# Altium PCB pay-ssm.PcbDoc (part 1 of 2)
Units mm, origin at the board's own origin, x right, y up, seen from the top; angles counter-clockwise.
Board outline 128 x 54 mm, 4 copper layers (Top Layer, GND, VCC, Bottom Layer), stack 0.778 mm thick; 182 components, 174 nets, 793 pads, 185 vias.
Unrouted connection lines stored in the file: 368.
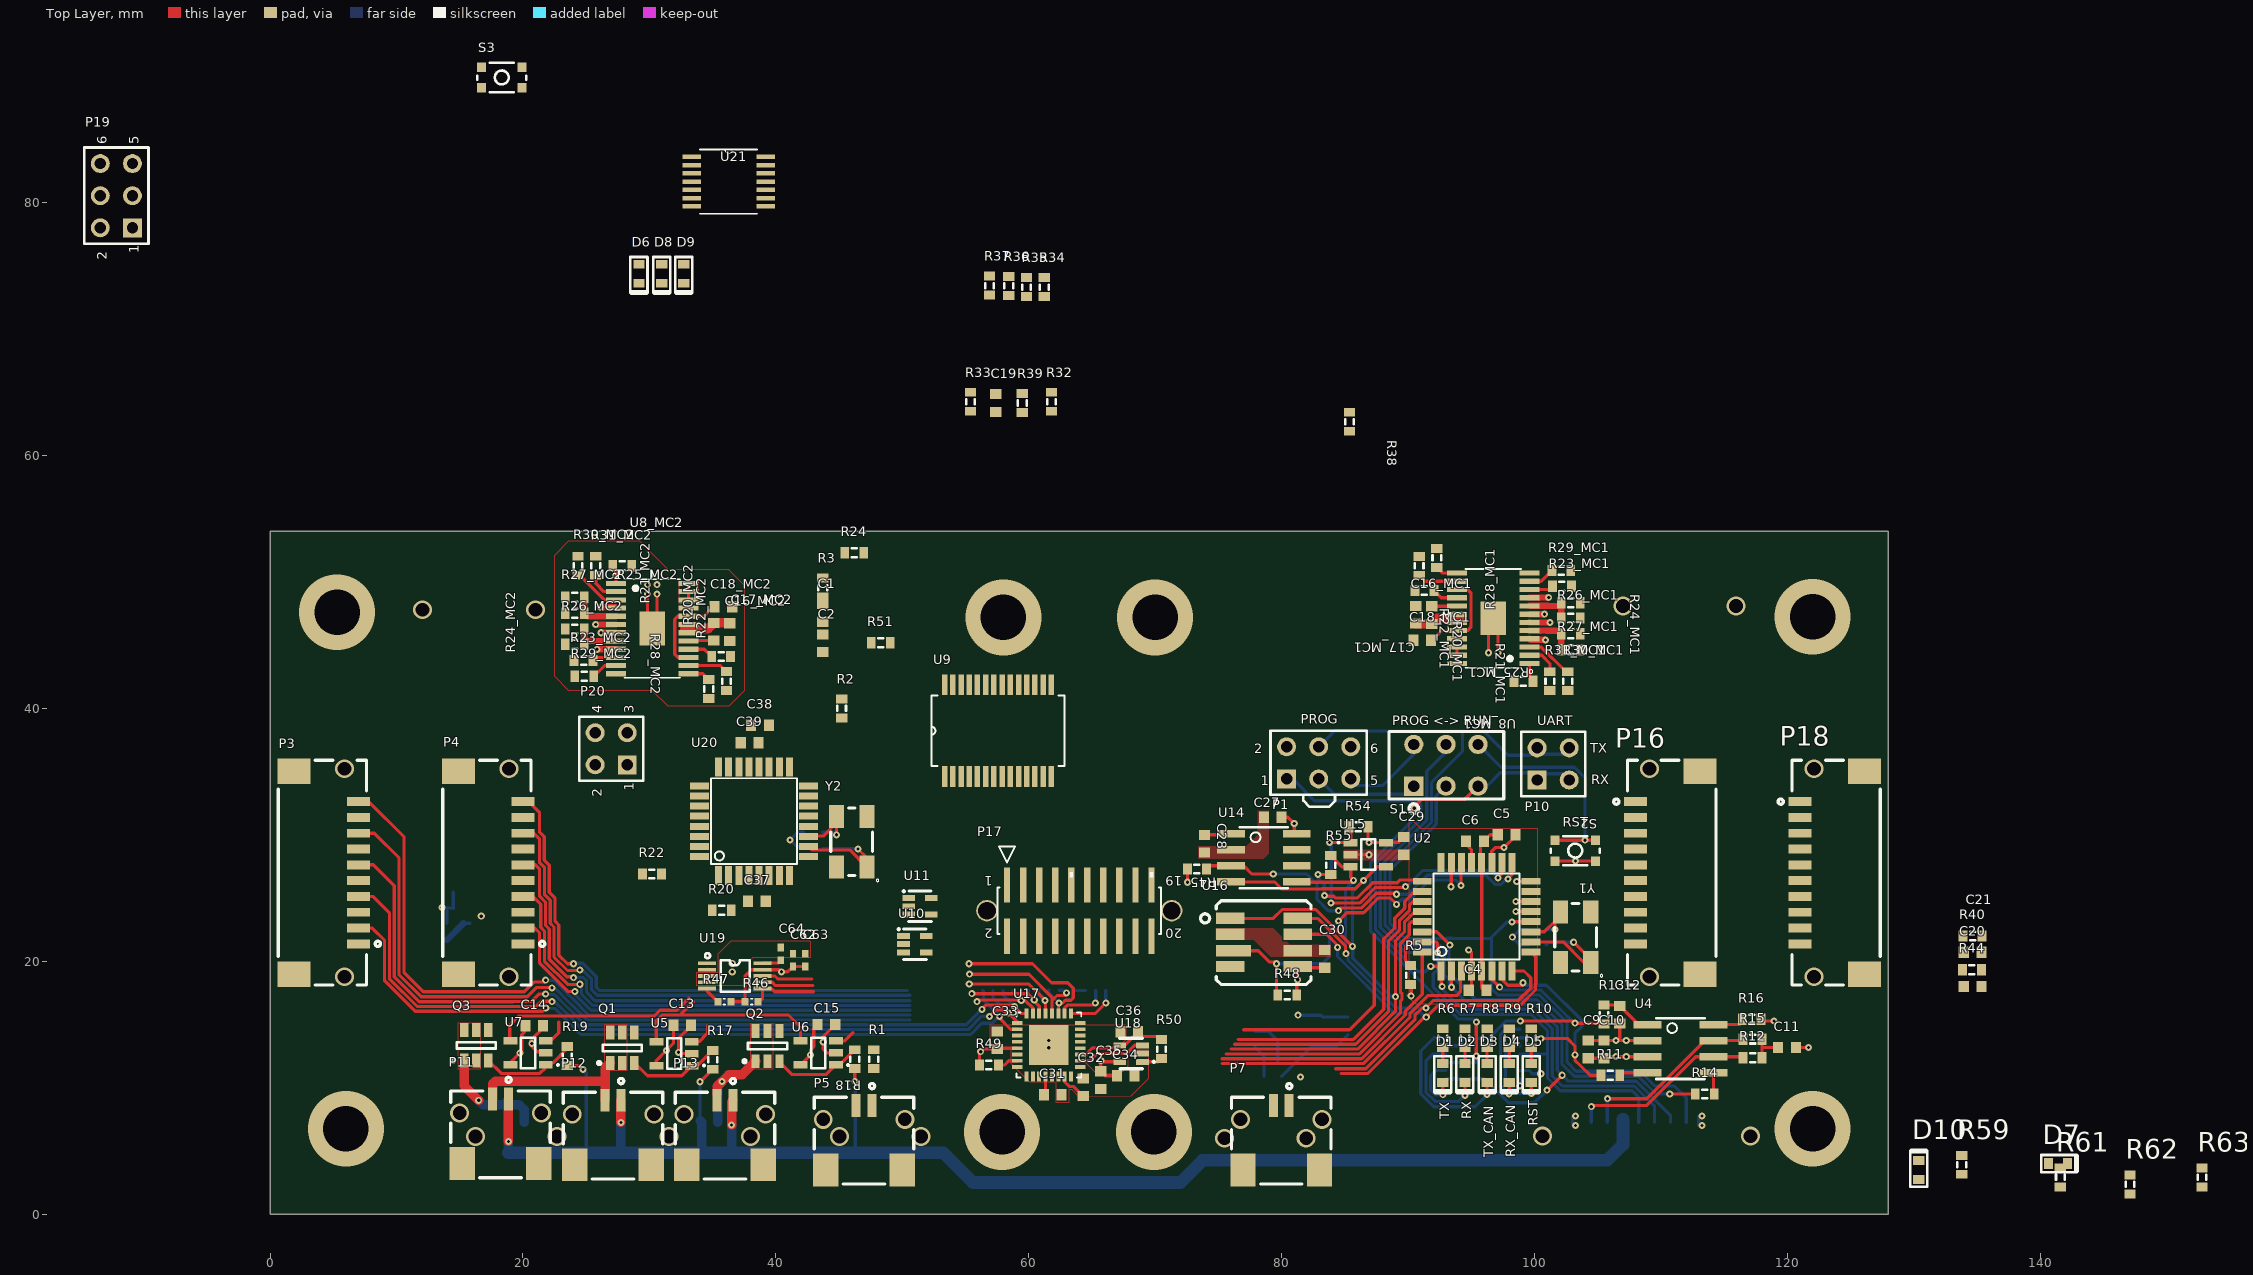
[diagram p0: Top Layer view]
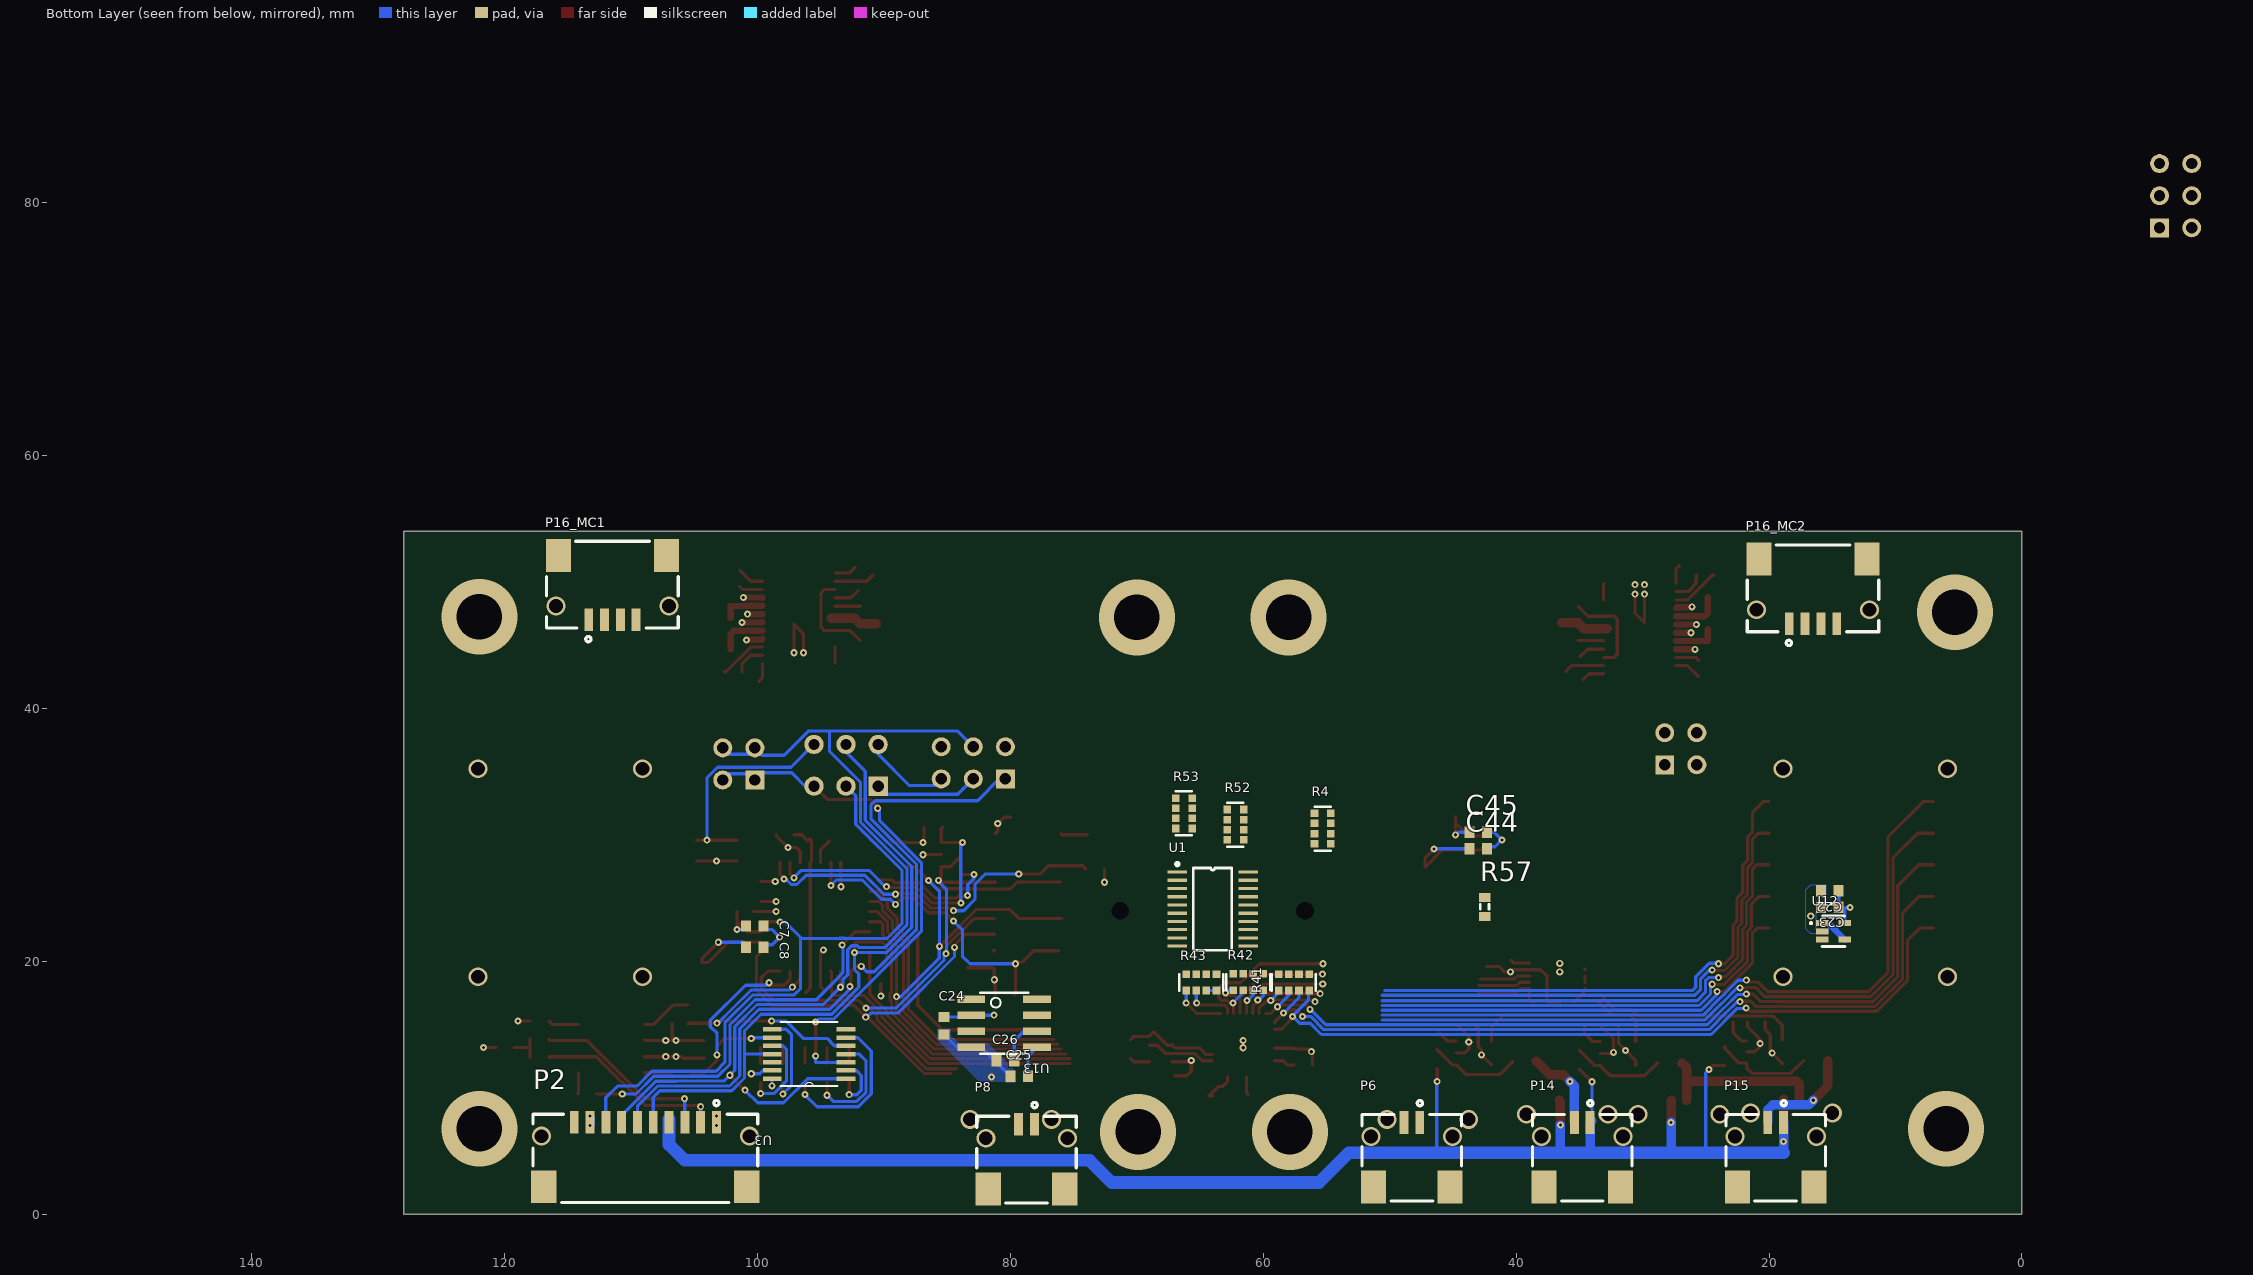
[diagram p1: Bottom Layer view, seen from below]
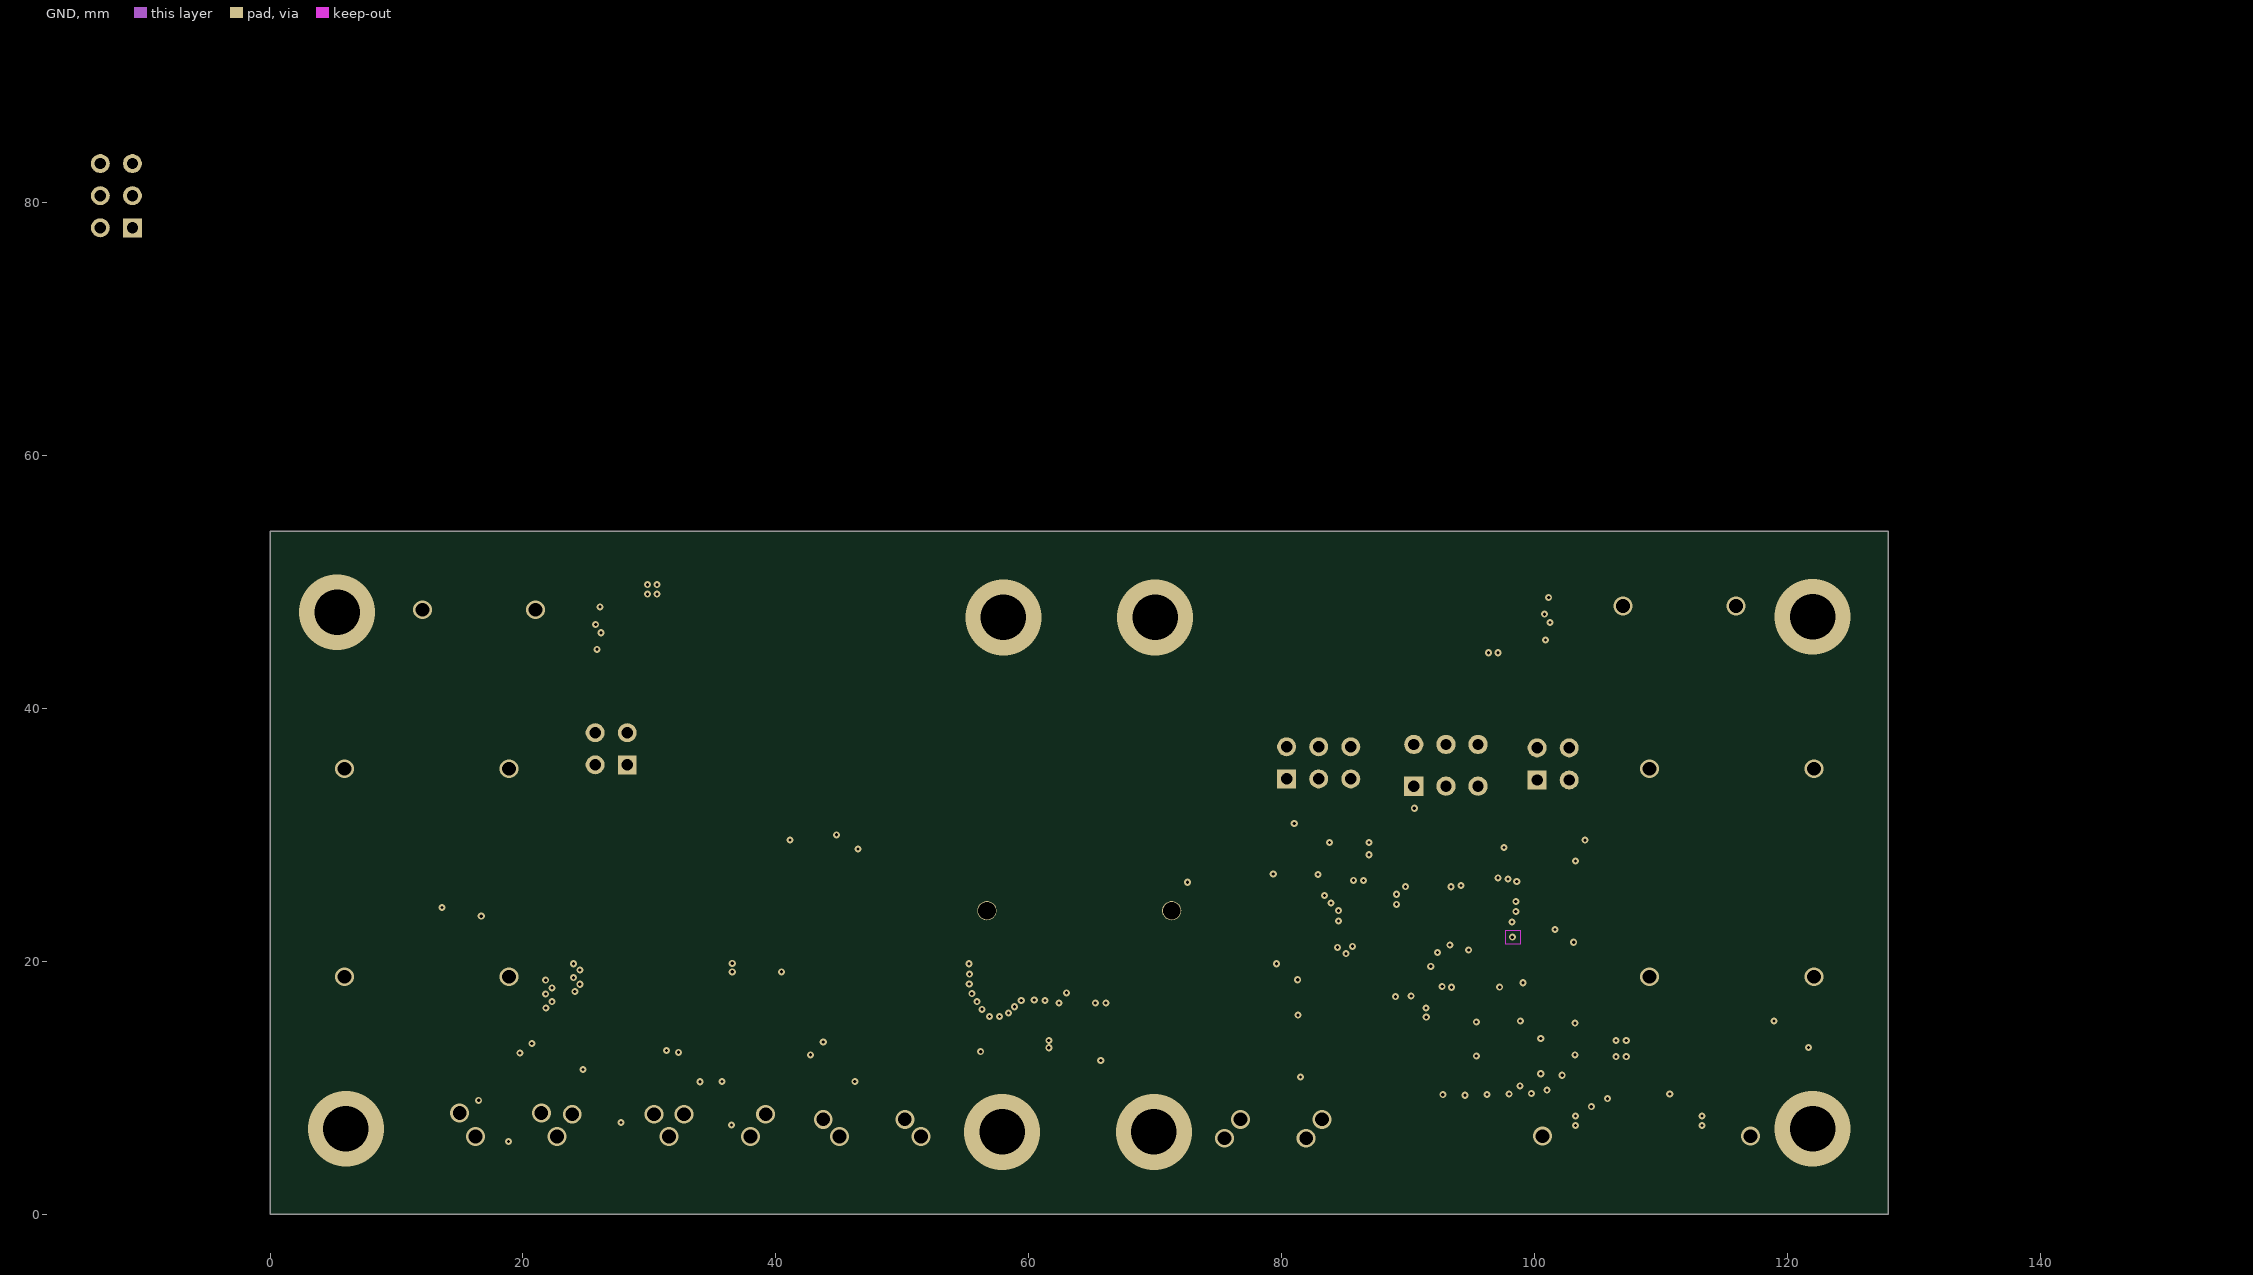
[diagram p2: GND]
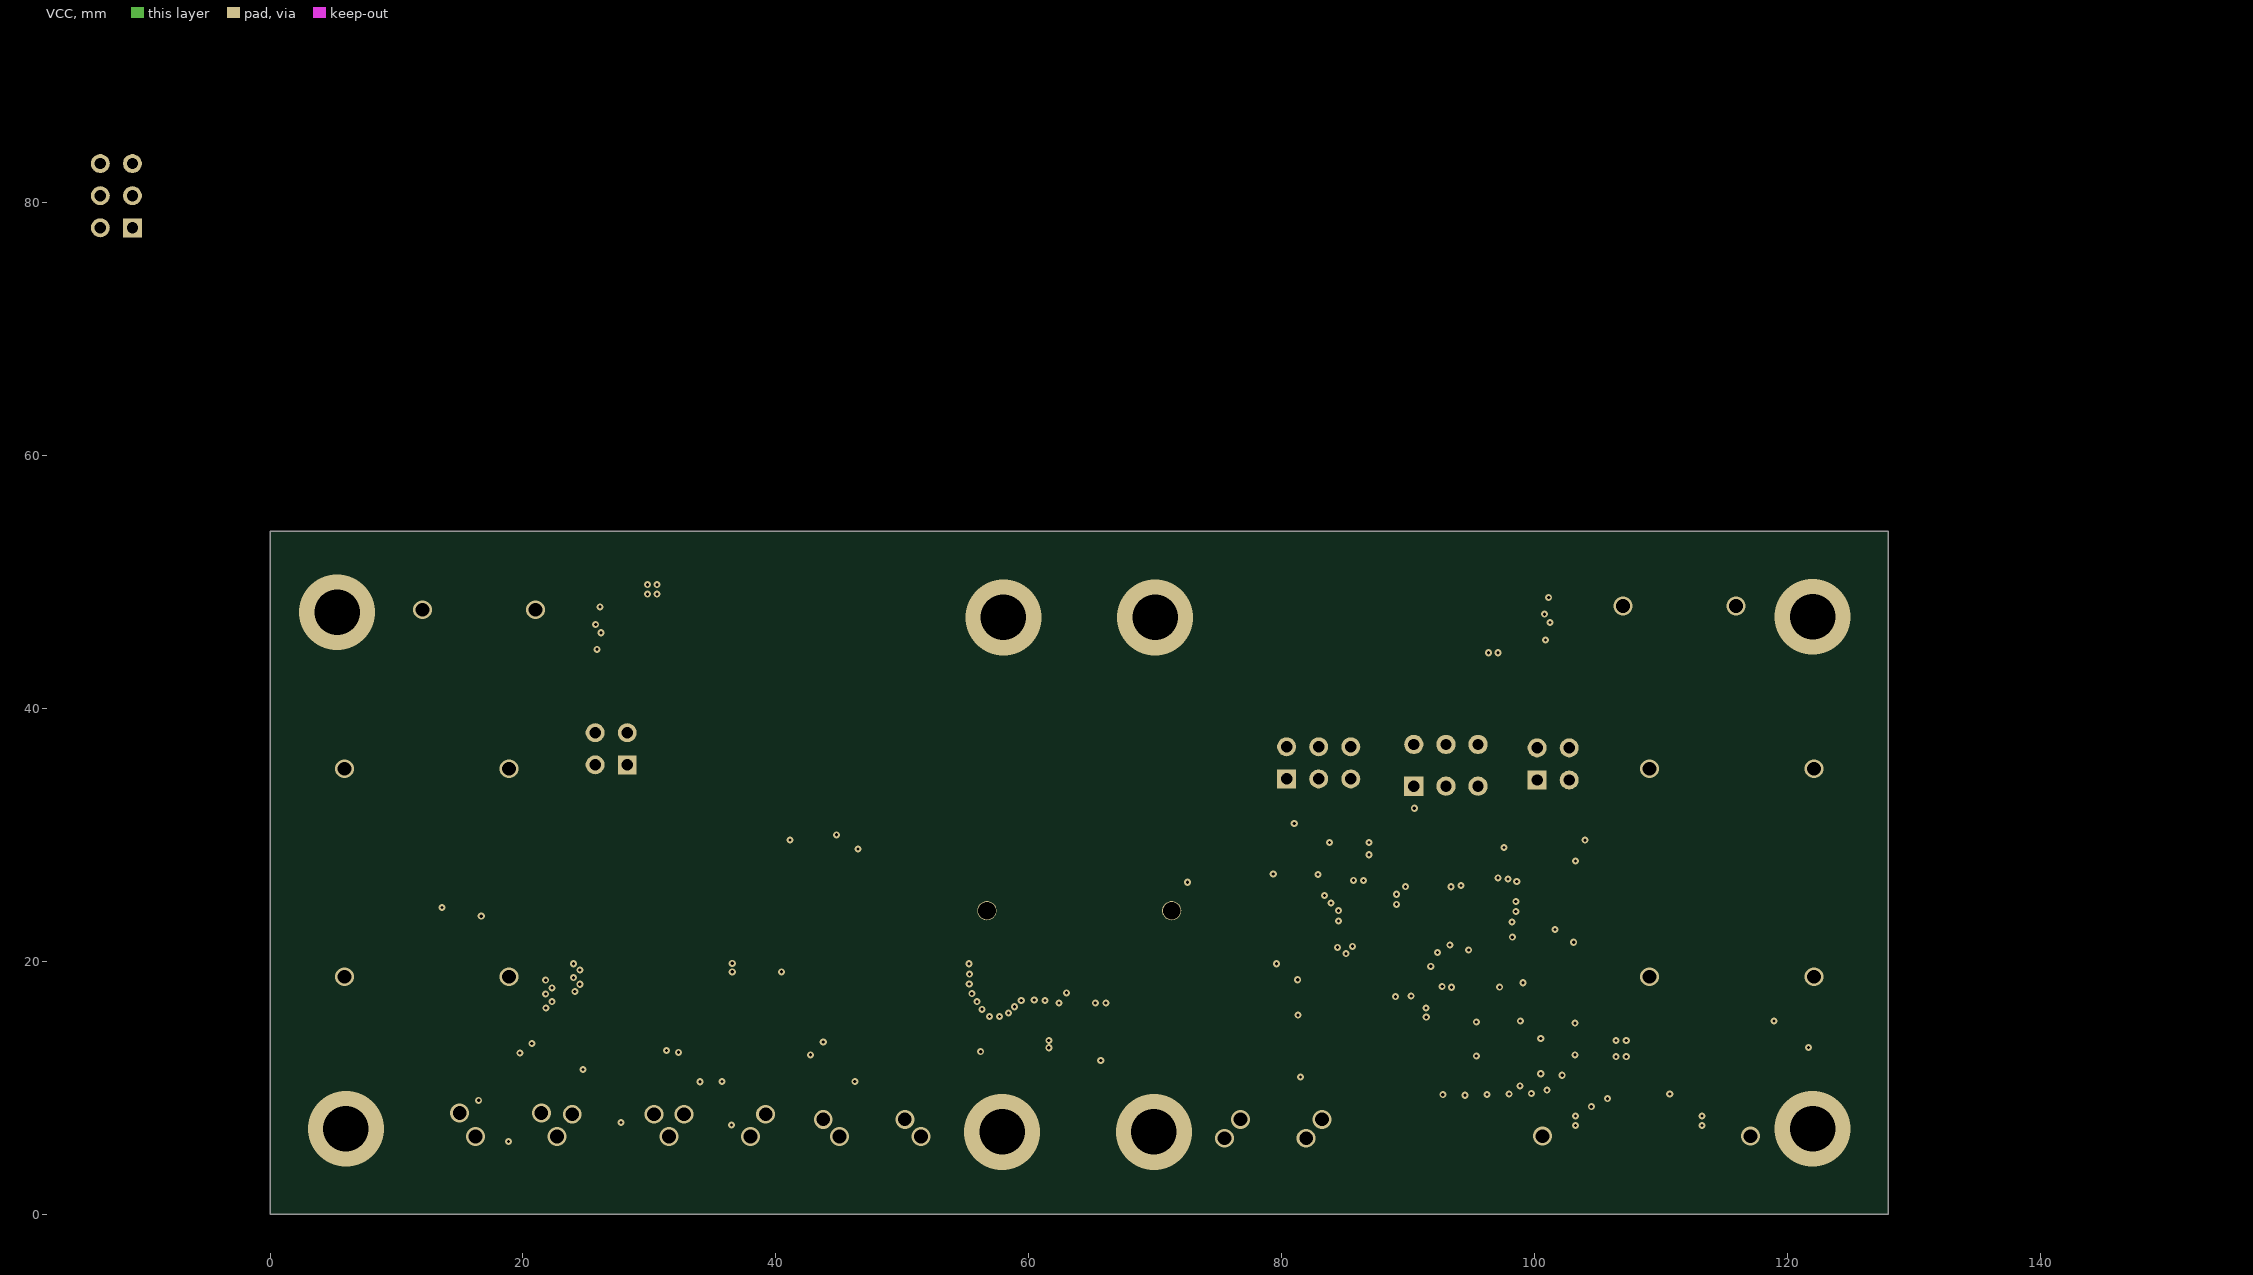
[diagram p3: VCC]

## Layer stack, top to bottom
Top Solder: solder mask 0.0102, Solder Resist, Dk 3.5
Top Layer: signal copper 0.0356
Dielectric 1: core 0.254, FR-4, Dk 4.2
GND: signal copper 0.036
Dielectric 5: prepreg 0.127, Dk 4.2
VCC: signal copper 0.036
Dielectric 4: core 0.254, Dk 4.2
Bottom Layer: signal copper 0.0356
Bottom Solder: solder mask 0.0102, Solder Resist, Dk 3.5

## Board outline
0,0 128,0 128,54 0,54

## Design rules (kind name [scope] priority, off if disabled: settings)
AssemblyTestPointUsage [All] p1 off:
AssemblyTestpoint [All] p1 off: testpointundercomponent=TRUE minsize=1.016 maxsize=2.54 preferedsize=1.524 minholesize=0 maxholesize=1.016 preferedholesize=0.813 testpointgrid=0.025 usegrid=TRUE gridtolerance=0 allowsidetop=TRUE allowsidebottom=TRUE
BoardOutlineClearance [OnLayer('VCC') or OnLayer('GND')] p1: gap=0.381 ignorepadtopadclearanceinfootprint=FALSE // Inner layer clearance
BoardOutlineClearance BoardOutlineClearance_1 [All] p2: gap=0.254 ignorepadtopadclearanceinfootprint=FALSE // top and bottom layers
Clearance [All] p1: gap=0.127 ignorepadtopadclearanceinfootprint=FALSE except(0: Arc-Hole Track-Hole SMDPad-Hole THPad-Hole Via-Hole Fill-Hole Poly-Hole Region-Hole Text-Hole)
FabricationTestPointUsage [All] p1 off: valid=0 allowmultiple=FALSE
FabricationTestpoint [All] p1 off: side=3 testpointundercomponent=FALSE minsize=1.016 maxsize=2.54 preferedsize=1.524 minholesize=0 maxholesize=1.016 preferedholesize=0.813 testpointgrid=0.025 allowsidetop=TRUE allowsidebottom=TRUE usegrid=TRUE gridtolerance=0
HoleSize [All] p1: absolutevalues=TRUE maxlimit=6.35 minlimit=0.203 maxpercent=80.000 minpercent=20.000
MinimumAnnularRing [All] p1: minimumring=0.127
MinimumSolderMaskSliver [All] p1: minsoldermaskwidth=0.102
PlaneConnect [All] p1: planeconnectstyle=Direct reliefexpansion=0.508 reliefentries=4 reliefconductorwidth=0.254 reliefairgap=0.254
PolygonConnect [All] p1: connectstyle=Direct reliefconductorwidth=0.254 reliefentries=4 polygonreliefangle="90 Angle" airgapwidth=0.254
RoomDefinition U_ATmega32M1 [InComponentClass('U_ATmega32M1')] p1: confinementstyle=ConfineIn formatcopy=TRUE lockcomponents=FALSE outline 86.25,20.343 125.25,20.343 125.25,43.45 86.25,43.45
RoomDefinition optical_micro [InComponentClass('optical_micro')] p2: confinementstyle=ConfineIn formatcopy=TRUE lockcomponents=FALSE outline 5.075,61.95 47.9,61.95 47.9,97.2 5.075,97.2
RoomDefinition U_sensors [InComponentClass('U_sensors')] p3: confinementstyle=ConfineIn formatcopy=TRUE lockcomponents=FALSE outline 146.6,16.45 167.4,16.45 167.4,38.15 146.6,38.15
RoomDefinition U_dac-layout [InComponentClass('U_dac-layout')] p4: confinementstyle=ConfineIn formatcopy=TRUE lockcomponents=FALSE outline 33.451,16.085 43.201,16.085 43.201,21.835 33.451,21.835
RoomDefinition U_sensors-digital [InComponentClass('U_sensors-digital')] p5: confinementstyle=ConfineIn formatcopy=TRUE lockcomponents=FALSE outline 7.744,9.453 7.744,9.117 52.844,9.117 52.844,9.051 54.169,9.051 54.169,9.043 62.582,9.043 62.582,9 72.313,9 72.313,9.069 74.806,9.069 74.806,9.146 74.906,9.146 74.906,9.253 120.456,9.253 120.456,9.588 111.588,9.588 111.588,9.453
RoomDefinition MC2 [InComponentClass('MC2')] p6: confinementstyle=ConfineIn formatcopy=TRUE lockcomponents=FALSE outline 10.7,40 37.4,40 37.4,53.5 10.7,53.5
RoomDefinition U_thermistorADC [InComponentClass('U_thermistorADC')] p7: confinementstyle=ConfineIn formatcopy=TRUE lockcomponents=FALSE outline 66.664,10.038 64.956,10.038 64.956,10.086 63.502,10.086 63.502,12.841 60.659,12.841 60.659,13.384 57.905,13.384 57.905,15.092 59.205,15.092 59.205,17.846 60.659,17.846 60.659,19.343 67.161,19.343 67.161,18.552 71.414,18.552 71.414,16.596 71.537,16.596 71.537,13.588 70.318,13.588 70.318,10.338 66.664,10.338
RoomDefinition "ADC Ref Voltage" [InComponentClass('ADC Ref Voltage')] p8: confinementstyle=ConfineIn formatcopy=TRUE lockcomponents=FALSE outline 58.987,19.537 58.987,16.362 58.085,16.362 58.085,12.498 55.037,12.498 55.037,9.897 49.526,9.897 49.526,18.008 49.777,18.008 49.777,19.506 55.026,19.506 55.026,19.537
RoomDefinition U_portExpander [InComponentClass('U_portExpander')] p9: confinementstyle=ConfineIn formatcopy=TRUE lockcomponents=FALSE outline 54.226,63.604 54.226,74.78 70.302,74.78 70.302,74.922 72.899,74.922 72.899,74.94 75.722,74.94 75.722,74.922 78.249,74.922 78.249,74.822 82.876,74.822 82.876,65.754 83.826,65.754 83.826,62.746 80.024,62.746 80.024,62.646 77.201,62.646 73.731,62.646 73.731,62.746 70.425,62.746 70.425,63.604
RoomDefinition U_heater_control [InComponentClass('U_heater_control')] p10: confinementstyle=ConfineIn formatcopy=TRUE lockcomponents=FALSE outline 0,34.438 0,43.512 8.868,43.512 8.868,37.429 13.258,37.429 13.258,29.804 15.758,29.804 15.758,26.722 15.81,26.722 15.81,9.212 19.816,9.212 19.816,9.112 29.666,9.112 29.666,0.244 20.592,0.244 20.592,0.344 10.742,0.344 10.742,10.271 6.85,10.271 6.85,10.894 1.748,10.894 1.748,14.963 0.298,14.963 0.298,24.738 0.198,24.738 0.198,34.438
RoomDefinition U_can_transciever [InComponentClass('U_can_transciever')] p11: confinementstyle=ConfineIn formatcopy=TRUE lockcomponents=FALSE outline 103.396,11.527 103.396,14.535 104.731,14.535 104.731,17.285 106.554,17.285 106.554,17.278 107.889,17.278 107.889,16.135 119.793,16.135 119.793,14.698 119.793,14.031 122.7,14.031 122.7,12.323 119.793,12.323 119.793,10.177 107.782,10.177 107.782,10.123 104.57,10.123 104.57,11.527
RoomDefinition pay-ssm [InComponentClass('pay-ssm')] p12: confinementstyle=ConfineIn formatcopy=TRUE lockcomponents=FALSE outline 142.5,5.915 142.5,6.8 143.172,6.8 143.172,4.58 149.631,4.58 149.631,3.178 149.638,3.178 149.638,2.539 151.406,2.539 151.406,0.635 148.709,0.635 148.709,0.269 147.296,0.269 147.296,0.274 145.745,0.274 145.745,1.165 144.107,1.165 142.5,1.165
RoomDefinition MC1 [InComponentClass('MC1')] p13: confinementstyle=ConfineIn formatcopy=TRUE lockcomponents=FALSE outline 116.275,53.432 89.575,53.432 89.575,39.932 116.275,39.932
RoomDefinition U_positioningAndThermistor [InComponentClass('U_positioningAndThermistor')] p14: confinementstyle=ConfineIn formatcopy=TRUE lockcomponents=FALSE outline 130.494,28.308 130.494,35.079 132.667,35.079 132.667,36.543 133.736,36.543 133.736,34.221 136.846,34.221 136.846,33.982 137.254,33.982 137.254,33.168 137.254,32.291 137.254,31.221 137.254,30.407 137.213,30.407 137.213,25.239 136.574,25.239 136.574,24.644 136.005,24.644 136.005,28.308
RoutingVias [All] p1: holewidth=0.254 width=0.559 viastyle="Through Hole" minholewidth=0.254 minwidth=0.559 maxholewidth=12.7 maxwidth=12.7
SilkToSilkClearance [All] p1: silktosilkclearance=0
SilkToSolderMaskClearance [IsPad] p1: minsilkscreentomaskgap=0.076 clearancetoexposedcopper=TRUE
SolderMaskExpansion [All] p1: expansion=0.102
Width [All] p1: maxlimit=254 minlimit=0.152 preferedwidth=0.254
21 further rules are at their usual default settings.

## Classes and differential pairs
component class U_sensors-digital: C1 C2 C? P16 P17 P18 P? R3 R4 R51 R52 R53 R? U1
component class optical_micro: C37 C38 C39 C44 C45 D6 D7 D8 D9 D10 P19 P20 R20 R22 R24 R57 R59 R61 R62 R63 S3 U20 U21 Y2
component class MC2: C16_MC2 C17_MC2 C18_MC2 P16_MC2 R20_MC2 R21_MC2 R22_MC2 R23_MC2 R24_MC2 R25_MC2 R26_MC2 R27_MC2 R28_MC2 R29_MC2 R30_MC2 R31_MC2 U8_MC2
component class MC1: C16_MC1 C17_MC1 C18_MC1 P16_MC1 R20_MC1 R21_MC1 R22_MC1 R23_MC1 R24_MC1 R25_MC1 R26_MC1 R27_MC1 R28_MC1 R29_MC1 R30_MC1 R31_MC1 U8_MC1
channel class motor_control: U_motor_control_1 U_motor_control_2
component class U_thermistorADC: C31 C32 C33 C34 C35 C36 R49 R50 U17 U18
component class U_sensors: C27 C28 C29 C30 R45 R48 R54 R55 U14 U15 U16
component class "ADC Ref Voltage": C22 C23 C24 C25 C26 U12 U13
component class U_positioningAndThermistor: C20 C21 R40 R41 R42 R43 R44 U10 U11
component class U_portExpander: C19 R32 R33 R34 R35 R36 R37 R38 R39 U9
component class U_heater_control: C13 C14 C15 P11 P12 P13 P14 P15 Q1 Q2 Q3 R17 R18 R19 U5 U6 U7
component class U_dac-layout: C62 C63 C64 R46 R47 U19
component class U_can_transciever: C9 C10 C11 C12 R11 R12 R13 R14 R15 R16 U4
component class U_ATmega32M1: C4 C5 C6 C7 C8 D1 D2 D3 D4 D5 P1 P10 R5 R6 R7 R8 R9 R10 S1 S2 U2 U3 Y1
component class pay-ssm: P2 P3 P4 P5 P6 P7 P8 R1 R2

## Components (designator, comment, footprint, x,y, rotation, side; value= is the part's Value field where it differs from the comment)
C1 "0.1uF" 1608[0603] 43.7,47.55 r270 top (schematic designator C37)
C2 "10uF" 1608[0603] 43.7,45.15 r90 top (schematic designator C38)
C4 "0.1uF" 1608[0603] 95.5,17.693 r180 top
C5 "0.1uF" 1608[0603] 97.8,30 r0 top
C6 "0.1uF" 1608[0603] 95.3,29.5 r0 top
C7 "15pF 1%" 1608[0603] 100.225,22.792 r0 bottom value="14pF 1%"
C8 "15pF 1%" 1608[0603] 100.225,21.102 r0 bottom value="14pF 1%"
C9 "10uF" 1608[0603] 104.25,13.031 r270 top
C10 "0.1uF" 1608[0603] 105.5,13.031 r270 top
C11 "47pF" 1608[0603] 119.972,13.177 r180 top
C12 "0.1uF" 1608[0603] 106.75,15.774 r90 top
C13 "0.1uF" 1608[0603] 32.6,14.948 r0 top
C14 "0.1uF" 1608[0603] 20.9,14.9 r0 top
C15 "100pF" 1608[0603] 44,15 r0 top value=0.1uF
C16_MC1 "10uF" 1608[0603] 90.625,47.4 r270 top (schematic designator C16)
C16_MC2 "10uF" 1608[0603] 36.35,46.032 r90 top (schematic designator C16)
C17_MC1 "10nF 16V X7R" 1608[0603] 91.875,47.375 r270 top (schematic designator C17)
C17_MC2 "10nF 16V X7R" 1608[0603] 35.1,46.057 r90 top (schematic designator C17)
C18_MC1 "2.2uF" 1608[0603] 91.125,45.4 r0 top (schematic designator C18)
C18_MC2 "2.2uF" 1608[0603] 35.85,48.032 r180 top (schematic designator C18)
C19 "0.1uF" 1608[0603] 57.4,64.15 r270 top
C20 "0.1uF" 1608[0603] 134.65,20.7 r180 top
C21 "0.1uF" 1608[0603] 134.65,18 r180 top
C22 "10uF" 1608[0603] 15.2,25.562 r180 bottom
C23 "0.1uF" 1608[0603] 15.2,24.262 r180 bottom
C24 "10uF" 1608[0603] 85.252,14.9 r90 bottom
C25 "1uF" 1608[0603] 79.3,10.9 r180 bottom
C26 "10uF" 1608[0603] 80.4,12.122 r180 bottom
C27 "0.22uF" 1608[0603] 79.3,31.381 r0 top
C28 "0.1uF" 1608[0603] 73.9,29.3 r90 top
C29 "0.1uF" 1608[0603] 89.675,29.125 r90 top
C30 "0.1uF" 1608[0603] 83.4,20.187 r270 top
C31 "1uF" 1608[0603] 61.9,9.448 r180 top
C32 "10uF" 1608[0603] 64.3,10.034 r270 top
C33 "1uF" 1608[0603] 57.5,13.748 r270 top
C34 "10uF" 1608[0603] 67.673,10.948 r180 top
C35 "0.1uF" 1608[0603] 65.7,10.6 r90 top
C36 "1uF" 1608[0603] 67.95,14.411 r0 top
C37 "0.1uF" 1608[0603] 38.5,24.75 r180 top (schematic designator C39)
C38 "0.1uF" 1608[0603] 38.75,38.65 r0 top (schematic designator C40)
C39 "0.1uF" 1608[0603] 37.925,37.275 r0 top (schematic designator C41)
C44 "15pF 1%" 1608[0603] 43,28.9 r0 bottom value="14pF 1%"
C45 "15pF 1%" 1608[0603] 43,30.2 r0 bottom value="14pF 1%"
C62 "0.1uF" 0402#1 41.351,20.085 r270 top (schematic designator C1)
C63 "100pF" 0402#1 42.326,20.085 r270 top (schematic designator C2)
C64 "150nF" 0402#1 40.401,20.585 r90 top (schematic designator C3)
D1 "LED2" 0603-LED 92.753,11.155 r270 top
D2 "LED2" 0603-LED 94.503,11.155 r270 top
D3 "LED2" 0603-LED 96.253,11.155 r270 top
D4 "LED2" 0603-LED 98.003,11.155 r270 top
D5 "LED2" 0603-LED 99.753,11.155 r270 top
D6 "LED2" 0603-LED 29.175,74.375 r270 top
D7 "LED2" 0603-LED 141.4,4 r0 top
D8 "LED2" 0603-LED 30.975,74.375 r270 top
D9 "LED2" 0603-LED 32.725,74.375 r270 top
D10 "LED2" 0603-LED 130.4,3.5 r90 top
P1 "PROG" HDR2X3 80.395,34.42 r0 top
P2 "INCOMING FROM OBC" DF14-10P-1.25H(55) 108.875,7.262 r0 bottom
P3 "THERMISTORS 1-5" DF14-10P-1.25H(55) 7,27 r90 top
P4 "THERMISTORS 6-10" DF14-10P-1.25H(55) 20,27 r90 top
P5 "PHT_TRANS_1" DF14-2P-1.25H(55) 46.975,8.6 r180 top
P6 "IR_LED_1" DF14-2P-1.25H(55) 48.255,7.25 r0 bottom
P7 "PHT_TRANS_2" DF14-2P-1.25H(55) 79.975,8.6 r180 top
P8 "IR_LED_2" DF14-2P-1.25H(55) 78.725,7.1 r0 bottom
P10 "UART" HDR2X2 100.21,34.335 r0 top (schematic designator P9)
P11 "HEAT1" DF14-2P-1.25H(55) 18.225,9.1 r180 top (schematic designator P10)
P12 "HEAT2" DF14-2P-1.25H(55) 27.125,9 r180 top (schematic designator P11)
P13 "HEAT3" DF14-2P-1.25H(55) 35.975,9 r180 top (schematic designator P12)
P14 "HEAT4" DF14-2P-1.25H(55) 34.775,7.25 r0 bottom (schematic designator P13)
P15 "HEAT5" DF14-2P-1.25H(55) 19.475,7.25 r0 bottom (schematic designator P14)
P16 "OUTGOING" DF14-10P-1.25H(55) 108,27 r270 top
P16_MC1 "MOTOR" DF14-4P-1.25H(55) 111.475,47 r180 bottom (schematic designator P15)
P16_MC2 "MOTOR" DF14-4P-1.25H(55) 16.525,46.7 r180 bottom (schematic designator P15)
P17 "Header 10X2" CON20_2X10_Female 64,24 r180 top locked
P18 "OUTGOING" DF14-10P-1.25H(55) 121,27 r270 top locked
P19 "Header 3X2" HDR2X3 -10.885,78.01 r90 top
P20 "Header 2X2" HDR2X2 28.25,35.535 r90 top
Q1 "N-MOS" SOT23-6_N 27.85,13.148 r90 top
Q2 "N-MOS" SOT23-6_N 39.35,13.29 r90 top
Q3 "N-MOS" SOT23-6_N 16.3,13.349 r90 top
R1 "330" J1-0603 47.75,12.254 r270 top
R2 "330" J1-0603 45.2,40 r270 top
R3 "10K" J1-0603 43.7,49.55 r90 top (schematic designator R51)
R4 "100 Quad" ResQuad-320X150 55.3,30.5 r270 bottom (schematic designator R52)
R5 "30K" J1-0603 90.2,18.9 r270 top
R6 "330" J1-0603 92.753,13.905 r270 top
R7 "330" J1-0603 94.503,13.905 r270 top
R8 "330" J1-0603 96.253,13.905 r270 top
R9 "330" J1-0603 98.003,13.905 r270 top
R10 "330" J1-0603 99.753,13.905 r270 top
R11 "100" J1-0603 106,10.977 r180 top
R12 "60" J1-0603 117.25,12.377 r0 top
R13 "100" J1-0603 105.5,15.781 r270 top
R14 "100" J1-0603 113.473,9.5 r180 top
R15 "60" J1-0603 117.25,13.844 r0 top
R16 "0 Ohm" J1-0603 117.181,15.419 r180 top
R17 "1K" J1-0603 35,12.205 r270 top
R18 "1K" J1-0603 46.25,12.254 r270 top
R19 "1K" J1-0603 23.5,12.5 r270 top
R20 "20K" J1-0603 35.725,24.025 r180 top (schematic designator R56)
R20_MC1 "10K" J1-0603 91.299,49.325 r180 top (schematic designator R20)
R20_MC2 "10K" J1-0603 35.676,44.107 r0 top (schematic designator R20)
R21_MC1 "10K" J1-0603 92.287,51.9 r270 top (schematic designator R21)
R21_MC2 "10K" J1-0603 34.688,41.532 r90 top (schematic designator R21)
R22 "20K" J1-0603 30.2,26.9 r180 top (schematic designator R58)
R22_MC1 "10K" J1-0603 90.875,51.275 r270 top (schematic designator R22)
R22_MC2 "10K" J1-0603 36.1,42.157 r90 top (schematic designator R22)
R23_MC1 "10K" J1-0603 102.175,49.65 r0 top (schematic designator R23)
R23_MC2 "10K" J1-0603 24.8,43.782 r180 top (schematic designator R23)
R24 "30K" J1-0603 46.2,52.3 r180 top (schematic designator R60)
R24_MC1 "0" J1-0603 102.875,45.9 r180 top (schematic designator R24)
R24_MC2 "0" J1-0603 24.1,47.532 r0 top (schematic designator R24)
R25_MC1 "0" J1-0603 102.875,48.364 r180 top (schematic designator R25)
R25_MC2 "0" J1-0603 24.1,45.068 r0 top (schematic designator R25)
R26_MC1 "0" J1-0603 102.875,47.15 r180 top (schematic designator R26)
R26_MC2 "0" J1-0603 24.1,46.282 r0 top (schematic designator R26)
R27_MC1 "0" J1-0603 102.875,44.65 r180 top (schematic designator R27)
R27_MC2 "0" J1-0603 24.1,48.782 r0 top (schematic designator R27)
R28_MC1 "10K" J1-0603 99.125,42.15 r0 top (schematic designator R28)
R28_MC2 "10K" J1-0603 27.85,51.282 r180 top (schematic designator R28)
R29_MC1 "10K" J1-0603 102.125,50.9 r180 top (schematic designator R29)
R29_MC2 "10K" J1-0603 24.85,42.532 r0 top (schematic designator R29)
R30_MC1 "51K" J1-0603 102.625,42.15 r90 top (schematic designator R30)
R30_MC2 "51K" J1-0603 24.35,51.282 r270 top (schematic designator R30)
R31_MC1 "51K" J1-0603 101.225,42.15 r90 top (schematic designator R31)
R31_MC2 "51K" J1-0603 25.75,51.282 r270 top (schematic designator R31)
R32 "10K" J1-0603 61.8,64.25 r270 top
R33 "10k" J1-0603 55.4,64.25 r270 top
R34 "0 Ohm" J1-0603 61.226,73.318 r90 top
R35 "0 Ohm" J1-0603 59.826,73.318 r90 top
R36 "0 Ohm" J1-0603 58.426,73.418 r90 top
R37 "0 Ohm" J1-0603 56.897,73.436 r90 top
R38 "0 Ohm" J1-0603 85.376,62.668 r90 top
R39 "0 Ohm" J1-0603 59.5,64.15 r270 top
R40 "1K" J1-0603 134.65,22 r180 top
R41 "10K 1% Quad" ResQuad-320X150 57.574,18.335 r0 bottom
R42 "10K 1% Quad" ResQuad-320X150 61.189,18.35 r0 bottom
R43 "10K 1% Quad" ResQuad-320X150 64.9,18.335 r0 bottom
R44 "1K" J1-0603 134.6,19.335 r0 top
R45 "10K" J1-0603 73.3,27.3 r180 top
R46 "10K" 0402#2 38.076,16.803 r180 top (schematic designator R3)
R47 "10K" 0402#2 35.939,16.803 r0 top (schematic designator R4)
R48 "10K" J1-0603 80.45,17.334 r180 top
R49 "10K" J1-0603 56.85,11.797 r180 top
R50 "100" J1-0603 70.5,13.048 r90 top
R51 "10k" J1-0603 48.3,45.2 r0 top (schematic designator R53)
R52 "100 Quad" ResQuad-320X150 62.2,30.8 r90 bottom (schematic designator R54)
R53 "100 Quad" ResQuad-320X150 66.27,31.7 r90 bottom (schematic designator R55)
R54 "10K" J1-0603 86.075,30.625 r0 top (schematic designator R46)
R55 "10K" J1-0603 83.9,27.6 r90 top (schematic designator R47)
R57 "330" J1-0603 42.5,24.3 r90 bottom
R59 "330" J1-0603 133.8,3.9 r90 top
R61 "330" J1-0603 141.6,2.9 r90 top
R62 "330" J1-0603 147.1,2.35 r90 top
R63 "330" J1-0603 152.8,2.9 r90 top
S1 "MODE SELECT" DPST_32m1_switch 93,35.5 r90 top
S2 "RST PUSH" Pushbutton#1 103.225,28.75 r0 top
S3 "SW-PB" Pushbutton#2 18.325,89.9 r0 top
U1 "SN74LVC244A" SOP65P650X440-20N 66.8,27.05 r180 bottom (schematic designator U19)
U2 "ATMega32M1" QFP80P900X900X120-32N 95.425,23.528 r90 top
U3 "SN74LV07A" SOP65P640X120-14N 95.921,12.66 r0 bottom
U4 "SN65HVD233D" SOIC127P500X600-8N 111.55,13.086 r270 top
U5 "MCP6546" SOT-23-5_95P290X160-5N 33.35,11.748 r180 top
U6 "MCP6546" SOT-23-5_95P290X160-5N 44.75,11.8 r180 top
U7 "MCP6546" SOT-23-5_95P290X160-5N 21.8,11.8 r180 top
U8_MC1 "DRV8834" SOP65P640X120-25N 96.745,47.125 r180 top (schematic designator U8)
U8_MC2 "DRV8834" SOP65P640X120-25N 30.23,46.307 r0 top (schematic designator U8)
U9 "MCP23S17" SOP65P780X200-28N 57.574,38.232 r90 top
U10 "AD8613" SOP-65P200X125-5N 50.1,22 r0 top
U11 "AD8613" SOP-65P200X125-5N 50.5,25 r0 top
U12 "AD8613" SOP-65P200X125-5N 15.8,23.012 r180 bottom
U13 "REF5025" SOIC127P500X600-8N 80.5,15.1 r270 bottom
U14 "HIH7131" SOIC127P500X600-8N 78.6,28.181 r270 top
U15 "LM95071" SOT-23-5_95P290X160-5N 85.467,29.382 r0 top
U16 "MS5803-05BA" MS5803-05BA_125P640x620-8N 78.6,21.487 r0 top
U17 "ADS7952" QFN50P500X500X100-32N 61.589,13.376 r180 top
U18 "AD8613" SOP-65P200X125-5N 69,12.048 r180 top
U19 "DAC7562" SOP10-50P300X300-10N 34.551,19.835 r0 top (schematic designator U1)
U20 "ATMega32M1" QFP80P900X900X120-32N 38.275,31.075 r90 top
U21 "SN74LV07A" SOP65P640X120-14N 36.271,81.66 r0 top
Y1 "8MHz Crystal" OSCSC500X320X110-4N 103.25,21.903 r180 top
Y2 "8MHz Crystal" OSCSC500X320X110-4N 46,29.45 r180 top

## Footprints (in the part's own frame and the unit in brackets; to place one, negate y for a bottom-side part, rotate by r counter-clockwise, add the part's x,y. Pads: shape width x height; smd on the part's side, far side on the other; paste and mask are expansions set on the pad)
0402#1 [mm] "Chip Capacitor, Body 1.0x0.5mm, IPC High Density"
  rect 0.6x0.5 smd: 1(-0.5,0) 2(0.5,0)
  body extent -0.55,-0.3 0.55,0.3, height 1.3
0402#2 [mm] "0402 Resistor"
  rect 0.55x0.6 smd: 1(-0.525,0) 2(0.525,0)
  silkscreen extent -0.08,-0.22 0.07,0.23
0603-LED [mm]
  rect 0.7x0.9 smd: 1(-0.75,0) 2(0.75,0)
  silkscreen extent -1.32,-0.67 1.5,0.67, body extent -0.85,-0.48 0.85,0.48, height 0.9
1608[0603] [mm] "Chip Capacitor, Body 1.6x0.8mm, IPC High Density"
  rect 0.8x0.9 smd: 1(-0.7,0) 2(0.7,0)
  body extent -0.87,-0.48 0.87,0.48, height 1.3
CON20_2X10_Female [mil] "1.27mm pitch, 20 position female header"
  rect 20x110 smd: 1(225,-80) 2(225,80) 3(175,-80) 4(175,80) 5(125,-80) 6(125,80) 7(75,-80) 8(75,80) 9(25,-80) 10(25,80) 11(-25,-80) 12(-25,80) 13(-75,-80) 14(-75,80) 15(-125,-80) 16(-125,80) 17(-175,-80) 18(-175,80) 19(-225,-80) 20(-225,80)
  round 66.93 / inner round 60 / far side round 38 hole 55.12: 21(-287.6,0) 22(287.6,0)
  silkscreen extent -255,-200 255,73, body extent 0,0 10,10, height 10
DF14-2P-1.25H(55) [mm]
  rect 0.7x1.8 smd: 1(-0.625,0) 2(0.625,0)
  rect 2x2.6 smd: ""(-3.025,5.1) ""(3.025,5.1)
  silkscreen extent -3.94,-1.73 3.94,6.22
DF14-4P-1.25H(55) [mm]
  rect 0.7x1.8 smd: 1(-1.875,0) 2(-0.625,0) 3(0.625,0) 4(1.875,0)
  rect 2x2.6 smd: ""(-4.275,5.1) ""(4.275,5.1)
  silkscreen extent -5.21,-1.73 5.21,6.22
DF14-10P-1.25H(55) [mm]
  rect 0.7x1.8 smd: 1(-5.625,0) 2(-4.375,0) 3(-3.125,0) 4(-1.875,0) 5(-0.625,0) 6(0.625,0) 7(1.875,0) 8(3.125,0) 9(4.375,0) 10(5.625,0)
  rect 2x2.6 smd: ""(-8.025,5.1) ""(8.025,5.1)
  silkscreen extent -8.89,-1.73 8.89,6.35
DPST_32m1_switch [mil]
  rect 60x60 hole 35: 1(-65,100)
  round 60 hole 35: 2(-65,0) 3(-65,-100) 4(65,100) 5(65,0) 6(65,-100)
  silkscreen extent -150,-180 105,177
HDR2X2 [mm] "Connector; Header; 2x2 Position"
  rect 1.5x1.5 hole 0.9: 1(0,0)
  round 1.5 hole 0.9: 2(0,2.54) 3(2.54,0) 4(2.54,2.54)
  silkscreen extent -1.27,-1.27 3.81,3.81
HDR2X3 [mm] "Connector; Header; 3x2 Position"
  rect 1.5x1.5 hole 0.9: 1(0,0)
  round 1.5 hole 0.9: 2(0,2.54) 3(2.54,0) 4(2.54,2.54) 5(5.08,0) 6(5.08,2.54)
  silkscreen extent -1.27,-1.27 6.35,3.81
J1-0603 [mm] "Chip Resistor, Body 1.6x0.8mm, IPC High Density"
  rect 0.7x0.9 smd: 1(-0.75,0) 2(0.75,0)
  silkscreen extent -0.2,-0.35 0.2,0.35, body extent -0.85,-0.48 0.85,0.48, height 0.9
MS5803-05BA_125P640x620-8N [mm] "Footprint for the MS5803-05BA pressure sensor"
  rect 2.25x0.9 smd: 1(-2.675,1.9) 2(-2.675,0.65) 4(-2.675,-1.9) 5(2.675,-1.9) 6(2.675,-0.65) 7(2.675,0.65) 8(2.675,1.9)
  rect 2.8x0.9 smd: 3(-2.4,-0.65)
  silkscreen extent -5.01,-3.33 3.73,3.3
OSCSC500X320X110-4N [mm]
  rect 1.2x1.8 smd: 1(-1.2,2) 2(-1.2,-2) 3(1.2,-2) 4(1.2,2)
  silkscreen extent -2.15,-2.67 1.65,3.15
Pushbutton#1 [mm] "PTS830GM140 SMTR LFS"
  rect 0.7x0.75 smd: 1(-1.6,0.825) 1(1.6,0.825) 2(-1.6,-0.825) 2(1.6,-0.825)
  silkscreen extent -1.92,-1.17 1.92,1.15
Pushbutton#2 [mm] "PTS830GM140 SMTR LFS"
  rect 0.7x0.75 smd: 1(-1.6,0.825) 2(1.6,0.825) 3(1.6,-0.825) 4(-1.6,-0.825)
  silkscreen extent -1.92,-1.17 1.92,1.15
QFN50P500X500X100-32N [mil]
  rect 32x12 smd: 1(-98,69) 2(-98,49) 3(-98,30) 4(-98,10) 5(-98,-10) 6(-98,-30) 7(-98,-49) 8(-98,-69) 17(98,-69) 18(98,-49) 19(98,-30) 20(98,-10) 21(98,10) 22(98,30) 23(98,49) 24(98,69)
  rect 12x32 smd: 9(-69,-98) 10(-49,-98) 11(-30,-98) 12(-10,-98) 13(10,-98) 14(30,-98) 15(49,-98) 16(69,-98) 25(69,98) 26(49,98) 27(30,98) 28(10,98) 29(-10,98) 30(-30,98) 31(-49,98) 32(-69,98)
  rect 124x124 smd: 33(0,0)
  silkscreen extent -101,-101 101,101
QFP80P900X900X120-32N [mm]
  rect 1.5x0.55 smd: 1(-4.3,2.8) 2(-4.3,2) 3(-4.3,1.2) 4(-4.3,0.4) 5(-4.3,-0.4) 6(-4.3,-1.2) 7(-4.3,-2) 8(-4.3,-2.8) 17(4.3,-2.8) 18(4.3,-2) 19(4.3,-1.2) 20(4.3,-0.4) 21(4.3,0.4) 22(4.3,1.2) 23(4.3,2) 24(4.3,2.8)
  rect 0.55x1.5 smd: 9(-2.8,-4.3) 10(-2,-4.3) 11(-1.2,-4.3) 12(-0.4,-4.3) 13(0.4,-4.3) 14(1.2,-4.3) 15(2,-4.3) 16(2.8,-4.3) 25(2.8,4.3) 26(2,4.3) 27(1.2,4.3) 28(0.4,4.3) 29(-0.4,4.3) 30(-1.2,4.3) 31(-2,4.3) 32(-2.8,4.3)
  silkscreen extent -3.4,-3.4 3.4,3.4
ResQuad-320X150 [mm] "Concave terminal quad pack resistor."
  rect 0.6x0.6 smd: 1(-1.2,-0.65) 2(-0.4,-0.65) 3(0.4,-0.65) 4(1.2,-0.65) 5(1.2,0.65) 6(0.4,0.65) 7(-0.4,0.65) 8(-1.2,0.65)
  silkscreen extent -1.73,-0.62 1.75,0.65
SOIC127P500X600-8N [mm]
  rect 0.6x2.2 smd: 1(-1.905,-2.6) 2(-0.635,-2.6) 3(0.635,-2.6) 4(1.905,-2.6) 5(1.905,2.6) 6(0.635,2.6) 7(-0.635,2.6) 8(-1.905,2.6)
  silkscreen extent -2.4,-1.9 2.4,1.9
SOP10-50P300X300-10N [mm]
  rect 1.45x0.3 smd: 1(0,0) 2(0,-0.5) 3(0,-1) 4(0,-1.5) 5(0,-2) 6(4.4,-2) 7(4.4,-1.5) 8(4.4,-1) 9(4.4,-0.5) 10(4.4,0)
  silkscreen extent -0.15,-2.25 3.38,0.81
SOP65P640X120-14N [mil]
  rect 58x14 smd: 1(-115,77) 2(-115,51) 3(-115,26) 4(-115,0) 5(-115,-26) 6(-115,-51) 7(-115,-77) 8(115,-77) 9(115,-51) 10(115,-26) 11(115,0) 12(115,26) 13(115,51) 14(115,77)
  silkscreen extent -89,-100 89,100
SOP65P640X120-25N [mm]
  rect 1.57x0.41 smd: 1(-2.87,3.575) 2(-2.87,2.925) 3(-2.87,2.275) 4(-2.87,1.625) 5(-2.87,0.975) 6(-2.87,0.325) 7(-2.87,-0.325) 8(-2.87,-0.975) 9(-2.87,-1.625) 10(-2.87,-2.275) 11(-2.87,-2.925) 12(-2.87,-3.575) 13(2.87,-3.575) 14(2.87,-2.925) 15(2.87,-2.275) 16(2.87,-1.625) 17(2.87,-0.975) 18(2.87,-0.325) 19(2.87,0.325) 20(2.87,0.975) 21(2.87,1.625) 22(2.87,2.275) 23(2.87,2.925) 24(2.87,3.575)
  rect 2.025x2.68 smd: 25(0,0)
  silkscreen extent -3.13,-3.9 2.2,4.36
SOP65P650X440-20N [mm]
  rect 1.55x0.25 smd: 1(0,0) 2(0,-0.65) 3(0,-1.3) 4(0,-1.95) 5(0,-2.6) 6(0,-3.25) 7(0,-3.9) 8(0,-4.55) 9(0,-5.2) 10(0,-5.85) 11(5.6,-5.85) 12(5.6,-5.2) 13(5.6,-4.55) 14(5.6,-3.9) 15(5.6,-3.25) 16(5.6,-2.6) 17(5.6,-1.95) 18(5.6,-1.3) 19(5.6,-0.65) 20(5.6,0)
  silkscreen extent -0.13,-6.18 4.32,0.76
SOP65P780X200-28N [mil]
  rect 65x17 smd: 1(-143,166) 2(-143,141) 3(-143,115) 4(-143,90) 5(-143,64) 6(-143,38) 7(-143,13) 8(-143,-13) 9(-143,-38) 10(-143,-64) 11(-143,-90) 12(-143,-115) 13(-143,-141) 14(-143,-166) 15(143,-166) 16(143,-141) 17(143,-115) 18(143,-90) 19(143,-64) 20(143,-38) 21(143,-13) 22(143,13) 23(143,38) 24(143,64) 25(143,90) 26(143,115) 27(143,141) 28(143,166)
  silkscreen extent -110,-207 110,207
SOP-65P200X125-5N [mm]
  rect 1x0.47 smd: 1(0,0) 2(0,-0.65) 3(0,-1.3) 4(1.8,-1.3) 5(1.8,0)
  silkscreen extent -0.42,-1.85 1.8,0.57
SOT23-6_N [mm] "SOT23, 6-Leads, Body 2.9x1.6mm, Pitch 0.95mm, Lead Span 2.7mm, IPC Medium Density"
  rect 1.1x0.65 smd: 1(-1.2,0.95) 2(-1.2,0) 3(-1.2,-0.95) 4(1.2,-0.95) 5(1.2,0) 6(1.2,0.95)
  silkscreen extent -1.32,-1.55 0.25,1.95, body extent -0.9,-1.55 0.9,1.55, height 1.45
SOT-23-5_95P290X160-5N [mm]
  rect 1.1x0.6 smd: 1(0,0) 2(0,-0.95) 3(0,-1.9) 4(2.8,-1.9) 5(2.8,0)
  silkscreen extent -0.99,-2.16 1.96,0.25

## Part data
C1 C2 C37 C38 C39: library part "Cap Semi", "Capacitor (Semiconductor SIM Model)", LatestRevisionDate=29-May-2009, LatestRevisionNote="IPC-7351 Footprint Added.", PackageDescription="Chip Capacitor", PackageReference=C1206, Published=8-Jun-2000, Publisher="Altium Limited", Supplier=Digi-Key
C4 C5 C6 C10 C12 C13 C14 C19 C20 C21 C23 C28 C29 C30 C35 C62: library part "Cap Semi", "Capacitor (Semiconductor SIM Model)", Supplier Part Number=587-3807-1-ND, LatestRevisionDate=29-May-2009, LatestRevisionNote="IPC-7351 Footprint Added.", PackageDescription="Chip Capacitor", PackageReference=C1206, Published=8-Jun-2000, Publisher="Altium Limited", Supplier=Digi-Key
C7 C8 C44 C45: library part "Cap Semi", "Capacitor (Semiconductor SIM Model)", Supplier Part Number=490-16416-1-ND, LatestRevisionDate=29-May-2009, LatestRevisionNote="IPC-7351 Footprint Added.", PackageDescription="Chip Capacitor", PackageReference=C1206, Published=8-Jun-2000, Publisher="Altium Limited", Supplier=Digi-Key
C9 C16_MC1 C16_MC2 C22 C24 C26 C34: library part "Cap Semi", "Capacitor (Semiconductor SIM Model)", Supplier Part Number=587-3258-1-ND, LatestRevisionDate=29-May-2009, LatestRevisionNote="IPC-7351 Footprint Added.", PackageDescription="Chip Capacitor", PackageReference=C1206, Published=8-Jun-2000, Publisher="Altium Limited", Supplier=Digi-Key
C11: library part "Cap Semi", "Capacitor (Semiconductor SIM Model)", Supplier Part Number=587-5087-1-ND, LatestRevisionDate=29-May-2009, LatestRevisionNote="IPC-7351 Footprint Added.", PackageDescription="Chip Capacitor", PackageReference=C1206, Published=8-Jun-2000, Publisher="Altium Limited", Supplier=Digi-Key
C15 C64: library part "Cap Semi", "Capacitor (Semiconductor SIM Model)", Supplier Part Number=1276-1972-1-ND, LatestRevisionDate=29-May-2009, LatestRevisionNote="IPC-7351 Footprint Added.", PackageDescription="Chip Capacitor", PackageReference=C1206, Published=8-Jun-2000, Publisher="Altium Limited", Supplier=Digi-Key
C17_MC1 C17_MC2: library part "Cap Semi", "Capacitor (Semiconductor SIM Model)", Supplier Part Number=587-2708-1-ND, LatestRevisionDate=29-May-2009, LatestRevisionNote="IPC-7351 Footprint Added.", PackageDescription="Chip Capacitor", PackageReference=C1206, Published=8-Jun-2000, Publisher="Altium Limited", Supplier=Digi-Key
C18_MC1 C18_MC2: library part "Cap Semi", "Capacitor (Semiconductor SIM Model)", Supplier Part Number=1276-1085-1-ND, LatestRevisionDate=29-May-2009, LatestRevisionNote="IPC-7351 Footprint Added.", PackageDescription="Chip Capacitor", PackageReference=C1206, Published=8-Jun-2000, Publisher="Altium Limited", Supplier=Digi-Key
C25 C31 C33 C36: library part "Cap Semi", "Capacitor (Semiconductor SIM Model)", Supplier Part Number=490-1550-1-ND, LatestRevisionDate=29-May-2009, LatestRevisionNote="IPC-7351 Footprint Added.", PackageDescription="Chip Capacitor", PackageReference=C1206, Published=8-Jun-2000, Publisher="Altium Limited", Supplier=Digi-Key
C27: library part "Cap Semi", "Capacitor (Semiconductor SIM Model)", Supplier Part Number=1276-1112-1-ND, LatestRevisionDate=29-May-2009, LatestRevisionNote="IPC-7351 Footprint Added.", PackageDescription="Chip Capacitor", PackageReference=C1206, Published=8-Jun-2000, Publisher="Altium Limited", Supplier=Digi-Key
C32: library part Cap, "Capacitor", Supplier Part Number=587-3258-1-ND, LatestRevisionDate=17-Jul-2002, LatestRevisionNote="Re-released for DXP Platform.", PackageDescription="Radial Cap, Thru-Hole; 2 Leads; 0.3 in Pin Spacing", Published=8-Jun-2000, Publisher="Altium Limited", Supplier=Digi-Key
C63: library part "Cap Semi", "Capacitor (Semiconductor SIM Model)", Supplier Part Number=1276-1632-1-ND, LatestRevisionDate=29-May-2009, LatestRevisionNote="IPC-7351 Footprint Added.", PackageDescription="Chip Capacitor", PackageReference=C1206, Published=8-Jun-2000, Publisher="Altium Limited", Supplier=Digi-Key
D1 D2 D3 D4 D5 D6 D7 D8 D9 D10: "Typical RED, GREEN, YELLOW, AMBER GaAs LED", LatestRevisionDate=17-Jul-2002, LatestRevisionNote="Re-released for DXP Platform.", PackageDescription="SM LED; 2 Flat Leads", PackageReference=3.2X1.6X1.1, PackageVersion=Feb-2002, Published=8-Jun-2000, Publisher="Altium Limited", Supplier=Digi-Key
P1: library part "Header 3X2", "Header, 3-Pin, Dual row", LatestRevisionDate=17-Jul-2002, LatestRevisionNote="Re-released for DXP Platform.", Publisher="Altium Limited", Supplier=Digi-Key
P2: library part "Header 10", "Header, 10-Pin", Supplier Part Number=H10329CT-ND, LatestRevisionDate=17-Jul-2002, LatestRevisionNote="Re-released for DXP Platform.", Publisher="Altium Limited", Supplier=Digi-Key
P3 P4 P16 P18: library part "Header 10", "Header, 10-Pin", LatestRevisionDate=17-Jul-2002, LatestRevisionNote="Re-released for DXP Platform.", Publisher="Altium Limited", Supplier=Digi-Key
P5 P6 P7 P8 P11 P12 P13 P14 P15: library part "Header 2", "Header, 2-Pin", LatestRevisionDate=17-Jul-2002, LatestRevisionNote="Re-released for DXP Platform.", Publisher="Altium Limited", Supplier=Digi-Key
P10: library part "Header 2X2", "Header, 2-Pin, Dual row", LatestRevisionDate=17-Jul-2002, LatestRevisionNote="Re-released for DXP Platform.", Publisher="Altium Limited", Supplier=Digi-Key
P16_MC1 P16_MC2: library part "Header 4", "Header, 4-Pin", LatestRevisionDate=17-Jul-2002, LatestRevisionNote="Re-released for DXP Platform.", Publisher="Altium Limited", Supplier=Digi-Key
P17: "Header, 10-Pin, Dual row", LatestRevisionDate=17-Jul-2002, LatestRevisionNote="Re-released for DXP Platform.", Publisher="Altium Limited"
P19: "Header, 3-Pin, Dual row", LatestRevisionDate=17-Jul-2002, LatestRevisionNote="Re-released for DXP Platform.", Publisher="Altium Limited", Supplier=Digi-Key
P20: "Header, 2-Pin, Dual row", LatestRevisionDate=17-Jul-2002, LatestRevisionNote="Re-released for DXP Platform.", Publisher="Altium Limited", Supplier=Digi-Key
Q1 Q2 Q3: library part FDC637BNZCT-ND, "N-MOS, low gate ON voltage", Supplier=Digi-Key, Supplier Part Number=FDC637BNZCT-ND
R1 R2 R3 R5 R6 R7 R8 R9 R10 R11 R12 R13 R14 R15 R16 R17 R18 R19 R20 R20_MC1 R20_MC2 R21_MC1 R21_MC2 R22 R22_MC1 R22_MC2 R23_MC1 R23_MC2 R24 R24_MC1 R24_MC2 R25_MC1 R25_MC2 R26_MC1 R26_MC2 R27_MC1 R27_MC2 R28_MC1 R28_MC2 R29_MC1 R29_MC2 R30_MC1 R30_MC2 R31_MC1 R31_MC2 R32 R33 R34 R35 R36 R37 R38 R39 R40 R44 R45 R46 R47 R48 R49 R50 R51 R54 R55 R57 R59 R61 R62 R63: library part Res3, "Resistor", LatestRevisionDate=29-May-2009, LatestRevisionNote="IPC-7351 Footprint Added.", PackageDescription="Chip Resistor", PackageReference=J1-0603, Published=8-Jun-2000, Publisher="Altium Limited", Supplier=Digi-Key
R4 R52 R53: library part "Res Quad Pack", "Quad pack resistor", Supplier Part Number=Y4101CT-ND, Supplier=Digi-Key
R41 R42 R43: library part "Res Quad Pack", "Quad pack resistor", Supplier=Digi-Key
S1: library part SW-DPDT, "Double-Pole, Double-Throw Switch", Supplier Part Number=401-2000-ND, LatestRevisionDate=17-Jul-2002, LatestRevisionNote="Re-released for DXP Platform.", PackageDescription="Switch; 6 Leads", PackageReference=DPDT-6, Published=24-Mar-1999, Publisher="Altium Limited", Supplier=Digi-Key
S2: library part SW-PB, "Switch", Supplier Part Number=CKN10587CT-ND, LatestRevisionDate=17-Jul-2002, LatestRevisionNote="Re-released for DXP Platform.", PackageDescription="Switch; 2 Leads", PackageReference=SPST-2, Published=24-Mar-1999, Publisher="Altium Limited", Supplier=Digi-Key
S3: "Switch", Supplier Part Number=CKN10587CT-ND, LatestRevisionDate=17-Jul-2002, LatestRevisionNote="Re-released for DXP Platform.", PackageDescription="Switch; 2 Leads", PackageReference=SPST-2, Published=24-Mar-1999, Publisher="Altium Limited", Supplier=Digi-Key
U1: "Octal buffer or driver with 3-state outputs.", Supplier Part Number 1=296-1230-1-ND, Supplier=Digi-Key, Supplier 1=Digi-Key
U2 U20: "Atmel 8-bit AVR microcontroller.", Supplier Part Number 1=ATMEGA32M1-AURCT-ND, Supplier=Digi-Key, Supplier 1=Digi-Key
U3 U21: "Six element 1-bit non-inverting open-drain buffer.", Supplier Part Number=296-27916-1-ND, Supplier=Digi-Key
U4: "3.3V CAN Transceiver with Standby Mode, Loop-back 8-SOIC -40 to 125", Package="SOIC-8 Texas Instruments", Supplier Part Number 1=296-14639-5-ND, Availability=Good, MF="Texas Instruments", MP=SN65HVD233D, Price="2.39 USD", SnapEDA_Link=https://www.snapeda.com/parts/SN65HVD233D/Texas%20Instruments/view-part/?ref=snap, Supplier=Digi-Key, Supplier 1=Digi-Key
U5 U6 U7: "Open-drain output sub-microamp comparator.", Supplier Part Number 1=MCP6546T-E/OTCT-ND, Supplier 1=Digi-Key
U8_MC1 U8_MC2: "Dual-bridge stepper or dc motor driver. 1.5A per coil with 2.5-10.8 V load supply.", Supplier Part Number 1=296-41246-1-ND, Supplier=Digi-Key, Supplier 1=Digi-Key
U9: "16 bit I/O expander with SPI interface.", Supplier Part Number 1=MCP23S17-E/SS-ND, Supplier=Digi-Key, Supplier 1=Digi-Key
U10 U11 U12 U18: "Low power, low noise rail-to-rail op-amp.", Supplier=Digi-Key
U13: "Voltage Reference", Supplier Part Number 1=296-22203-5-ND, Supplier=Digi-Key, Supplier 1=Digi-Key
U14: "Digital humidity/temperature sensors. +/- 3% RH, 0-100%, SPI output. Model version with filter and condensation resistant.", Supplier Part Number 1=480-5705-1-ND, Supplier=Digi-Key, Supplier 1=Digi-Key
U15: "13 bit plus sign digital temperature sensor. Nominal +/- 1 C accuracy from 0-70 C.", Supplier Part Number 1=LM95071CIMF/NOPBCT-ND, Supplier=Digi-Key, Supplier 1=Digi-Key
U16: "Digital 24-bit pressure sensor with SPI output. Operating range from 0-5bar, includes onboard temperature sensor and hermetic seal.", Supplier Part Number 1=223-1625-5-ND, Supplier=Digi-Key, Supplier 1=Digi-Key
U17: "ADC"
U19: "12-bit, low-power, voltage-output DAC with internal reference.", Supplier Part Number 1=296-29022-1-ND, Supplier=Digi-Key, Supplier 1=Digi-Key
Y1 Y2: library part "8MHz Abracom 4-Pin Crystal", "8MHz Abracom 4-pin crystal.", Supplier Part Number 1=535-13456-1-ND, Supplier 1=Digi-Key

## Via types
v1: diameter 0.559, hole 0.254, Top Layer to Bottom Layer, 145 vias
v2: diameter 1.5, hole 1.1, Top Layer to Bottom Layer, 32 vias
v3: diameter 6, hole 3.6, Top Layer to Bottom Layer, 8 vias

## Nets (pads, with @x,y where several pads share a name; then routed paths per layer and width w, separated by ;. In a path a pad name is that pad's centre, name@x,y a point inside that pad or via, vN(x,y) a via of type N, cw(c..) or ccw(c..) an arc to the next point about the centre after c; other vN are vias at no path point)
2V5: P3.1 P3.3 P3.5 P3.7 P3.9 P4.1 P4.3 P4.5 P4.7 P4.9 U12.1 U12.4 | length 2.3
  Bottom Layer w0.254: U12.1@15.3,23.012 U12.1@15.8,23.012
  Bottom Layer w0.5: U12.4@14,21.712 U12.1@15.3,23.012
"2V5 OUT": C26.2 C32.2 U12.3 U13.6 U17.31 | length 6.3
  Top Layer w0.254: U17.31@62.834,10.887 62.834,10.477 63.208,10.103 63.531,10.103 C32.2@64.3,9.334 C32.2@63.998,9.334
  Bottom Layer w0.254: U13.6@77.9,14.465 78.935,14.465 79.7,13.7 C26.2@79.7,12.122
3V3: C4.2 C5.2 C9.2 C10.2 C13.1 C14.1 C15.1 C19.2 C20.2 C21.2 C22.2 C23.2 C24.2 C27.2 C29.2 C30.2 C31.2 C33.2 C34.2 C35.2 C37.2 C38.2 C62.2 C63.2 P1.2 P2.9 P16.1 P16.10 P17.2 P17.19 P18.1 P19.2 R5.2 R6.1 R7.1 R8.1 R9.1 R10.1 R20.2 R20_MC1.2 R20_MC2.2 R22.2 R23_MC1.2 R23_MC2.2 R24.2 R32.2 R33.2 R34.1 R36.1 R38.1 R45.2 R46.2 R47.2 R48.1 R49.2 R54.2 R57.1 R59.1 R61.1 R62.1 R63.1 U2.4 U2.19 U3.14 U4.3 U5.5 U6.5 U7.5 U9.9 U10.5 U11.5 U12.5 U13.2 U14.8 U15.5 U16.5 U17.21 U17.28 U17.32 U18.5 U19.9 U20.4 U20.19 U21.14 | length 61.6
  Top Layer w0.254: U7.5@18.95,11.886 18.95,11.946 v1(19.75,12.746) 19.9,12.896 19.9,14.2 20.3,14.6 C14.1@20.3,15.174 ; U5.5@30.55,11.748 30.55,12.141 v1(31.35,12.941) 31.9,13.491 C13.1@31.9,14.948 ; R47.2@36.464,16.803 R46.2@37.551,16.803 37.551,18.81 38.076,19.335 U19.9@38.951,19.335 40.278,19.335 v1(40.451,19.162) 40.928,19.162 C62.2@41.351,19.585 C63.2@42.326,19.585 ; U6.5@41.95,11.8 v1(42.75,12.6) 42.75,13 43,13.25 43,14.7 C15.1@43.3,15 ; R49.2@56.1,11.797 56.1,12.748 v1(56.2,12.848) 56.4,13.048 C33.2@57.5,13.048 57.574,13.122 U17.21@59.1,13.122 ; C31.2@61.2,9.448 61.335,9.584 U17.28@61.335,10.887 ; C34.2@66.973,10.948 66.051,10.948 C35.2@65.7,11.3 v1(65.7,12.148) 65.8,12.048 U18.5@67.2,12.048 ; v1(72.55,26.25) R45.2@72.55,27.3 ; C27.2@80,31.381 80.481,31.381 80.5,31.4 v1(81,30.9) 81,30.286 U14.8@81.2,30.086 ; R48.1@81.2,17.334 81.2,18.084 81.275,18.159 v1(81.275,18.534) 81.275,19.387 81.375,19.487 C30.2@83.4,19.487 ; R54.2@86.825,30.625 86.825,29.475 v1(86.918,29.382) U15.5@88.267,29.382 ; U15.5@88.3,29.415 89.265,29.415 C29.2@89.675,29.825 ; v1(90.251,17.254) R5.2@90.251,18.25 ; C4.2@94.8,17.5 C4.2@94.8,17.693 94.8,17.775 95.025,18 U2.4@95.025,19.228 95.025,20.675 v1(94.8,20.9) ; U2.19@96.625,27.828 96.625,28.7 96.925,29 v1(97.6,29) 98.5,29.9 C5.2@98.5,30 ; v1@98.867,10.114 v1(98.867,10.147) ; C9.2@104.25,12.331 C10.2@105.5,12.331 105.88,12.331 106,12.451 v1(106.45,12.451) v1(107.26,12.451) U4.3@108.95,12.451
  Bottom Layer w0.254: v1(13.6,24.262) 14,24.262 ; U12.5@14,23.012 14,24.262 ; C22.2@14.481,25.462 14.481,24.162 14.479,24.162 14,24.262 ; v1(81.31,15.735) U13.2@83.1,15.735 83.235,15.6 C24.2@85.252,15.6 ; v1@86.8,29.5 v1(86.918,29.382) ; U3.14@98.842,10.705 98.867,10.68 v1(98.867,10.147)
+5: C16_MC1.2 C16_MC2.2 C17_MC1.2 C17_MC2.2 P2.4 P11.1 P12.1 P13.1 P14.1 P15.1 R17.2 R18.2 R19.2 U8_MC1.18 U8_MC1.19 U8_MC2.18 U8_MC2.19 | length 135.8
  Top Layer w0.254: R19.2@23.5,11.75 24.448,11.75 24.448,11.744 v1(24.75,11.442) ; v1(34.013,10.468) R17.2@35,11.455 ; v1(46.25,10.5) R18.2@46.25,11.504
  Top Layer w0.75: v1(18.85,5.75) P11.1@18.85,9.1 ; v1(27.75,7.25) P12.1@27.75,9 ; 32.793,46.307 34.65,46.307 C17_MC2.2@35.1,46.757 C16_MC2.2@36.383,46.757 ; v1(36.5,7.049) 36.5,8.9 P13.1@36.6,9 ; C16_MC1.2@90.592,46.675 C17_MC1.2@91.875,46.675 92.325,47.125 94.182,47.125
  Bottom Layer w0.254: v1(24.75,11.442) 25,11.192 25,4.85 ; P14.1@34.013,7.387 v1(34.013,10.468) ; 46.282,4.882 v1@46.282,10.468
  Bottom Layer w0.75: 18.85,4.85 v1(18.85,5.75) P15.1@18.85,7.25 ; 27.75,4.85 v1(27.75,7.25) ; P14.1@34.013,7.387 P14.1@34.15,7.25 34.15,4.85 ; v1(36.5,7.049) 36.5,4.85 36.551,4.85 ; 46.25,4.85 46.282,4.882
  Bottom Layer w1: 18.85,4.85 25,4.85 27.75,4.85 34.15,4.85 36.5,4.85 ; 36.551,4.85 46.25,4.85 53.25,4.85 55.6,2.5 72,2.5 73.75,4.25 105.75,4.25 107,5.5 P2.4@107,7.262 P2.4@107,7.5
ADC_C\S\: R49.1 U2.27 U17.23 | length 25.1
  Top Layer w0.254: R49.1@57.6,11.797 58.093,11.797 58.428,12.132 U17.23@59.1,12.132 ; 76.3,13.434 85.853,13.434 88.467,16.048 88.467,21.605 89.332,22.471 89.332,23.258 90.121,24.047 90.121,24.47 90.379,24.728 U2.27@91.125,24.728
ADC_S\Y\N\C\: P17.15 U1.7
CANH: P2.3 R15.1 U4.7 | length 14.6
  Top Layer w0.254: v1(105.781,9.131) 108.883,9.131 113.473,13.721 U4.7@114.15,13.721 116.377,13.721 R15.1@116.5,13.844
  Bottom Layer w0.254: P2.3@105.75,7.262 105.75,9.1 v1(105.781,9.131)
CANL: P2.2 R12.1 U4.6 | length 14.9
  Top Layer w0.254: v1(104.5,8.5) 104.598,8.598 108.888,8.598 112.742,12.451 U4.6@114.15,12.451 116.426,12.451 R12.1@116.5,12.377
  Bottom Layer w0.254: P2.2@104.5,7.262 v1(104.5,8.5)
CH2: P3.6 R41.6 U17.16 | length 65.5
  Top Layer w0.254: P3.6@7,27.625 8.168,27.625 9.819,25.974 9.819,18.777 11.792,16.804 19.187,16.804 19.193,16.81 20.664,16.81 21.25,17.396 21.25,17.4 v1(21.8,17.4) ; v1(56.3,16.2) 56.649,16.549 58.727,16.549 v1(58.877,16.4) 59.411,15.865 U17.16@59.837,15.865
  VCC w0.254: v1(56.3,16.2) v1@56.4,16.3
  Bottom Layer w0.254: v1(21.8,17.4) 21.833,17.367 22.501,17.367 23.563,16.305 23.572,16.305 24.901,14.976 55.059,14.976 v1@56.276,16.192 ; R41.6@57.974,17.685 57.974,17.303 v1(58.877,16.4)
CH3: P3.8 R41.5 U17.15 | length 62
  Top Layer w0.254: P3.8@7,30.125 8.25,30.125 10.2,28.175 10.2,18.934 11.95,17.185 19.029,17.185 19.035,17.191 20.347,17.191 21.09,17.933 22.267,17.933 v1(22.3,17.9) ; v1(55.9,16.8) 56.033,16.933 59.367,16.933 v1(59.412,16.888) 59.732,16.888 60.345,16.275 U17.15@60.345,15.865
  Bottom Layer w0.254: v1(22.3,17.9) 22.507,17.9 23.721,16.686 23.73,16.686 25.059,15.357 50.6,15.357 ; R41.5@58.774,17.685 58.774,17.526 v1(59.412,16.888)